# Altium PCB NeuroMIX_D.PcbDoc
Units mil, origin at the board's own origin, x right, y up, seen from the top; angles counter-clockwise.
Board outline 2000 x 1005 mil, 2 copper layers (Top Layer, Bottom Layer), stack 61.8 mil thick; 23 components, 13 nets, 80 pads, 233 vias.
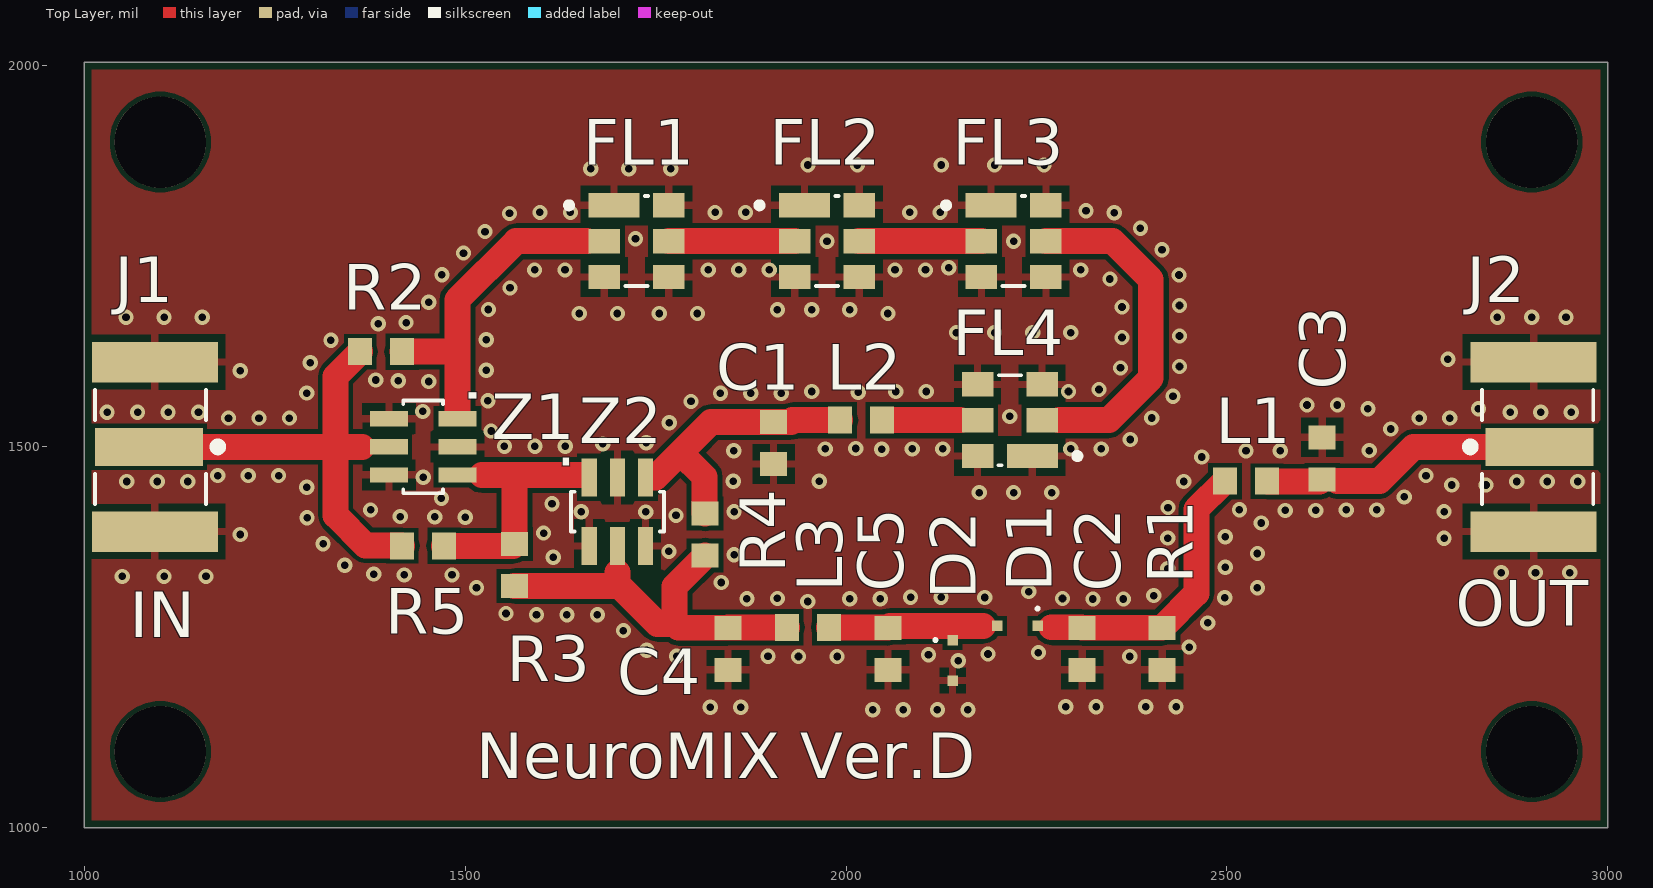
[diagram p0: Top Layer view]
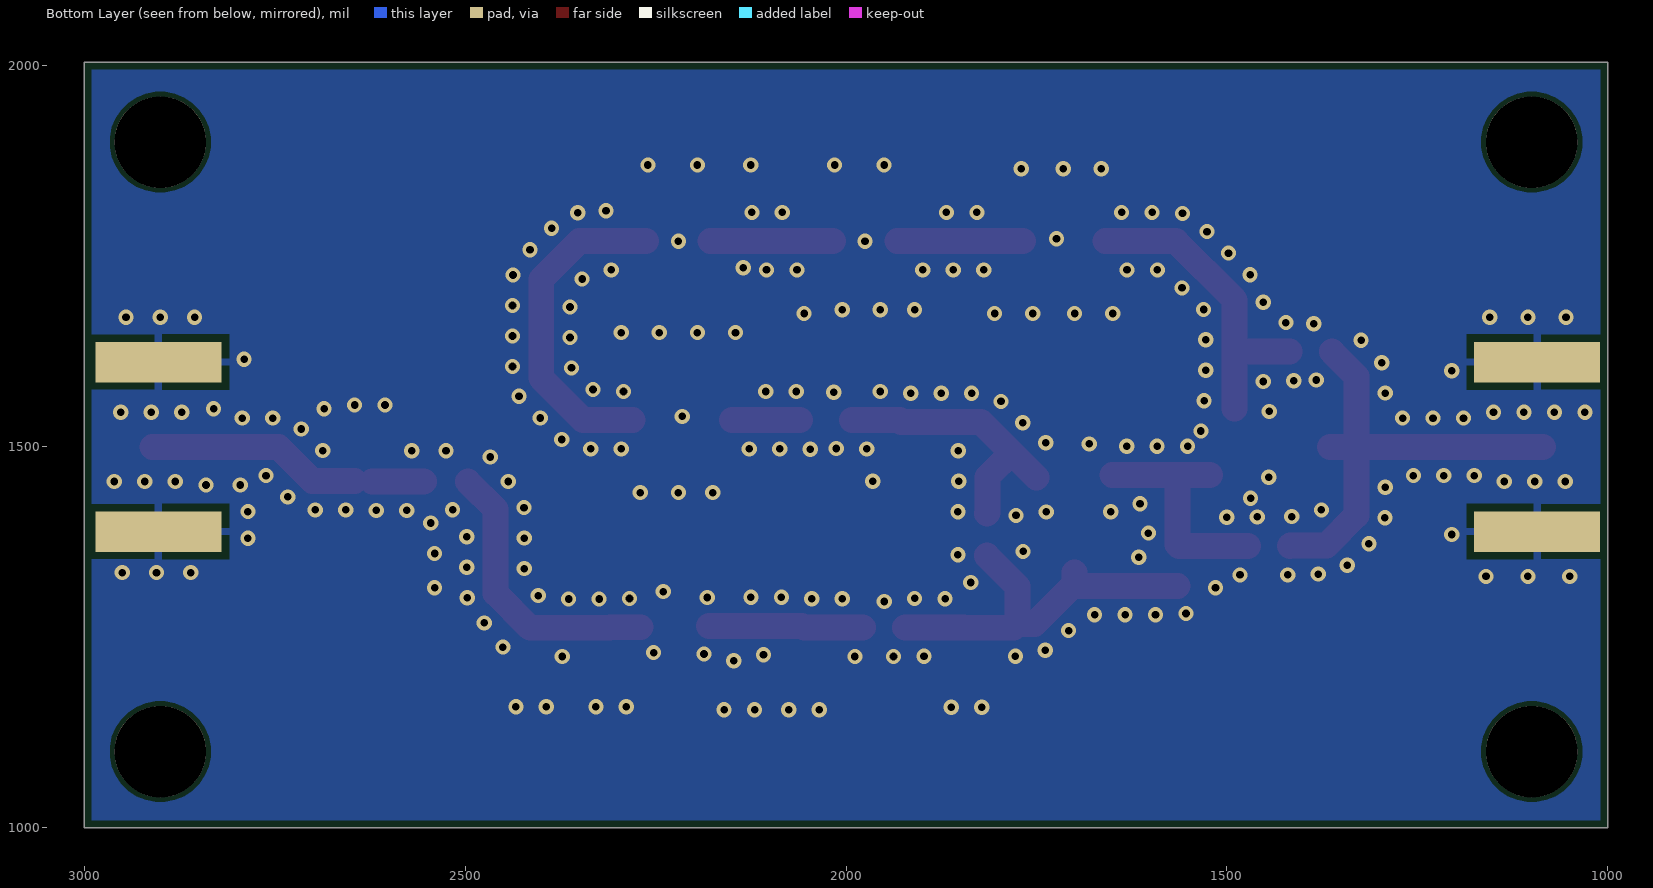
[diagram p1: Bottom Layer view, seen from below]

## Layer stack, top to bottom
Top Solder: solder mask 0.4, Solder Resist, Dk 3.5
Top Layer: signal copper 1.4
Dielectric 1: core 59, Core-043, Dk 4.3
Bottom Layer: signal copper 1.4
Bottom Solder: solder mask 0.4, Solder Resist, Dk 3.5

## Board outline
1000,1000 3000,1000 3000,2005 1000,2005

## Design rules (kind name [scope] priority, off if disabled: settings)
BoardOutlineClearance [All] p1: gap=10 ignorepadtopadclearanceinfootprint=FALSE except(0: Arc-SplitContinuation Track-SplitContinuation SMDPad-SplitContinuation THPad-SplitContinuation Via-SplitContinuation Fill-SplitContinuation Poly-SplitContinuation Region-SplitContinuation Text-SplitContinuation)
Clearance [All] p1: gap=6 ignorepadtopadclearanceinfootprint=FALSE except(0: Arc-Hole Track-Hole SMDPad-Hole THPad-Hole Via-Hole Fill-Hole Poly-Hole Region-Hole Text-Hole)
HoleSize [All] p1: absolutevalues=TRUE maxlimit=120 minlimit=1 maxpercent=80.000 minpercent=20.000
MinimumSolderMaskSliver [All] p1: minsoldermaskwidth=4
PolygonConnect [All] p1: thpad.connectstyle=Relief thpad.reliefconductorwidth=10 thpad.reliefentries=4 thpad.polygonreliefangle="90 Angle" thpad.airgapwidth=10 smdpad.connectstyle=Relief smdpad.reliefconductorwidth=10 smdpad.reliefentries=4 smdpad.polygonreliefangle="90 Angle" smdpad.airgapwidth=10 via.connectstyle=Direct via.reliefconductorwidth=10 via.reliefentries=4 via.polygonreliefangle="90 Angle" via.airgapwidth=10
RoutingVias [All] p1: holewidth=10 width=20 viastyle="Through Hole" minholewidth=6 minwidth=12 maxholewidth=28 maxwidth=50
SilkToSilkClearance [All] p1: silktosilkclearance=4
SilkToSolderMaskClearance [IsPad] p1: minsilkscreentomaskgap=4 clearancetoexposedcopper=TRUE
SolderMaskExpansion [All] p1: expansion=4 istentingtop=FALSE
Width [All] p1: maxlimit=50 minlimit=10 preferedwidth=34
26 further rules are at their usual default settings.

## Components (designator, comment, footprint, x,y, rotation, side; value= is the part's Value field where it differs from the comment)
C1 "6.8pF" SMD-0603 1905,1505 r90 top
C2 "1nF" SMD-0603 2310,1235 r90 top
C3 "82pF" SMD-0603 2625,1485 r270 top
C4 "44pF" SMD-0603 1845,1235 r90 top
C5 "1p_DNI" SMD-0603 2055,1235 r90 top
D1 "BAT63-02V" INF-SC79_V 2225,1265 r180 top
D2 "BAT63-02V" INF-SC79_V 2140,1220 r270 top
FL1 "SF2098E" FIL_SF2098E 1725,1770 r0 top
FL2 "SF2098E" FIL_SF2098E 1975,1770 r0 top
FL3 "SF2098E" FIL_SF2098E 2220,1770 r0 top
FL4 "SF2098E" FIL_SF2098E 2215,1535 r180 top
J1 "SMA-J-P-H-ST-EM1" SMA-J-P-H-ST-EM1 1085,1500 r270 top locked
J2 "SMA-J-P-H-ST-EM1" SMA-J-P-H-ST-EM1 2910,1500 r90 top
L1 "180nH" SMD-0603 2525,1455 r0 top
L2 "4.7nH" SMD-0603 2020,1535 r180 top
L3 "2.2nH" SMD-0603 1950,1263 r0 top
R1 "510k" SMD-0603 2415,1235 r90 top
R2 "0" SMD-0603 1390,1625 r0 top
R3 "0" SMD-0603 1565,1345 r270 top
R4 "0" SMD-0603 1815,1385 r90 top
R5 "0" SMD-0603 1445,1370 r0 top
Z1 "SP-2C1+" SP-2C1+ 1445,1500 r270 top
Z2 "SP-2C1+" SP-2C1+ 1700,1415 r0 top

## Footprints (in the part's own frame and the unit in brackets; to place one, negate y for a bottom-side part, rotate by r counter-clockwise, add the part's x,y. Pads: shape width x height; smd on the part's side, far side on the other; paste and mask are expansions set on the pad)
FIL_SF2098E [mm] "SAW Filter SM3030-6"
  rect 1.7x0.81 smd mask+0.051: 1(-0.75,1.195)
  rect 1.05x0.81 smd mask+0.051: 2(-1.075,0) 3(-1.075,-1.195) 4(1.075,-1.195) 5(1.075,0) 6(1.075,1.195)
  silkscreen extent -2.35,-1.5 0.38,1.5
INF-SC79_V [mm] "SC79, 2-Leads, Body 1.2x0.8 mm"
  rect 0.35x0.35 smd: 1(-0.672,0) 2(0.678,0)
  silkscreen extent -0.72,-0.62 -0.62,-0.53, body extent -0.6,-0.4 0.6,0.4, height 0.59
SMA-J-P-H-ST-EM1 [mm] "SMA-J-P-H-ST-EM1"
  rect 1.27x3.6 smd: 1(0,0)
  rect 1.35x4.2 smd: 2_1(-2.825,0.2) 3_1(2.825,0.2)
  rect 1.35x4.2 smd far side: 2_2(-2.825,0.2) 3_2(2.825,0.2)
  silkscreen extent -1.9,-1.8 1.9,2.44
SMD-0603 [mm] "SMD Body 1.6x0.8mm, IPC High Density"
  rect 0.8x0.9 smd: 1(-0.7,0) 2(0.7,0)
  body extent -0.87,-0.48 0.87,0.48, height 1.3
SP-2C1+ [mil] "Power Splitter/Combiner 640 to 1100MHz"
  rect 20x50 smd mask+2: 1(-37,45) 2(0,45) 3(37,45) 4(37,-45) 5(0,-45) 6(-37,-45)
  silkscreen extent -61,-26 61,26

## Part data
C1 C2 C3 C4 C5: library part CAP0603, "Ceramic Capacitor 0603"
D1 D2: "Single Silicon Schottky Diode, 100 mA IF Max, SC79, Green", Manufacturer=Infineon, ComponentLink1Description="Manufacturer URL", ComponentLink1URL=http://www.infineon.com/, ComponentLink2Description=Datasheet, ComponentLink2URL=http://www.infineon.com/dgdl/bat63series.pdf?folderId=db3a304314dca389011518104e5d0df2&fileId=db3a304314dca38901151817843c0df4&location=en.Products.RF.RF_Mixer___Detector_Schottky_Diodes.DATASHEET.bat63series.pdf, ComponentLink3Description="Package Specification", ComponentLink3URL=http://www.infineon.com/dgdl/SC79-Package_Overview.pdf?folderId=db3a30431936bc4b011951fbddb03b15&fileId=db3a30431936bc4b01195226fe583b41, Configuration=Single, CT (typ)="0.65 pF", DatasheetVersion=Jun-2011, Green=yes, Group="RF Signal Detection + Power Leveling", Halogen-free=yes, IF (max)="100 mA", Mounting Technology="Surface Mount", PackageDescription="2-Pin Semiconductor Package, 0.8 x 1.2 mm Body", PackageReference=SC79, PartNumber=BAT63-02V, VF (typ)="0.19 V", VR (max)="3 V"
FL1 FL2 FL3 FL4: "915MHz Frequency Wireless RF SAW Filter (Sound Acoustic Wave) 1.9dB 26MHz Bandwidth 6-SMD, No Lead", Package="SMD-6 Murata", Arrow_Electronics-Purchase-URL=https://snapeda.com/shop?store=Arrow+Electronics&id=2722455, Availability=Good, DigiKey-Purchase-URL=https://snapeda.com/shop?store=DigiKey&id=2722455, MF="Murata Electronics", Mouser-Purchase-URL=https://snapeda.com/shop?store=Mouser&id=2722455, MP=SF2098E, Price=None, SnapEDA_Link=https://www.snapeda.com/parts/SF2098E/Murata%20Electronics%20North%20America/view-part/2722455/?ref=snap
J1 J2: "Connector SMA F 50Ohm Solder ST Edge Mount Gold Over Nickel Tray", Package=None, Availability=Unavailable, MF=Samtec, MP=SMA-J-P-H-ST-EM1, Price=None, SnapEDA_Link=https://www.snapeda.com/parts/SMA-J-P-H-ST-EM1/Samtec%20Inc./view-part/?ref=snap
L1 L2 L3: library part L0603, "Inductor 0603"
R1 R2 R3 R4 R5: library part RES0603, "Resistor-0603"
Z1 Z2: "Power Divider, 2 Way-0 , 640 to 1100MHz, 50 ohms, SMT", Package=None, Availability=Warning, Check_prices=https://www.snapeda.com/parts/SBTC-2-10L+/Mini-Circuits/view-part/564803/?ref=eda, MF=Mini-Circuits, MP=SBTC-2-10L+, Price=None, Purchase-URL=https://pricing.snapeda.com/search/part/SBTC-2-10L+/?ref=eda, SnapEDA_Link=https://www.snapeda.com/parts/SBTC-2-10L+/Mini-Circuits/view-part/564803/?ref=snap

## Free pads (board coordinates)
  round 120 hole 120 unplated: 1(1100,1100) 1(1100,1900) 1(2900,1100) 1(2900,1900)

## Via types
v1: diameter 20, hole 10, Top Layer to Bottom Layer, tented both sides, 233 vias

## Nets (pads, with @x,y where several pads share a name; then routed paths per layer and width w, separated by ;. In a path a pad name is that pad's centre, name@x,y a point inside that pad or via, vN(x,y) a via of type N, cw(c..) or ccw(c..) an arc to the next point about the centre after c; other vN are vias at no path point)
GND: C1.1 C2.1 C3.1 C4.1 C5.1 D2.2 FL1.1 FL1.3 FL1.4 FL1.6 FL2.1 FL2.3 FL2.4 FL2.6 FL3.1 FL3.3 FL3.4 FL3.6 FL4.1 FL4.3 FL4.4 FL4.6 J1.2_1 J1.2_2 J1.3_1 J1.3_2 J2.2_1 J2.2_2 J2.3_1 J2.3_2 R1.1 Z1.2 Z1.4 Z1.6 Z2.2 Z2.4 Z2.6
  other v1: 2035,1155 2075,1155 2120,1155 2160,1155 1821.93,1158.25 1861.93,1158.25 2288.28,1158.87 2328.28,1158.87 2393.28,1158.87 2433.28,1158.87 2147.45,1219.28 1777.61,1225.23 1897.61,1225.05 1937.61,1224.89 1988.29,1224.89 2372.29,1224.83 2108.26,1227.28 2186.45,1228.16 2252.55,1229.99 1738.37,1232.98 2450.34,1237.19 1707.83,1258.81 2474.7,1268.91 1593.73,1279.72 1633.73,1279.72 1673.73,1279.72 1553.76,1281.3 1949.75,1297.05 2324.1,1300.28 2364.1,1300.28 1869.96,1300.5 1909.95,1301.11 2004.85,1300.5 2044.85,1300.5 2284.1,1301 2181.97,1302.33 2497.04,1302.09 2084.79,1302.72 2124.79,1302.72 2403.85,1304.76 2240,1310 1515,1315 2540,1315 1836.22,1322 1050,1330 1105,1330 1160,1330 1420.19,1331.89 1482.93,1331.89 1380.21,1332.99 2860,1335 2905,1335 2950,1335 2422.28,1340.26 2497.72,1342.09 1341.96,1344.69 1615.84,1355.17 1853.11,1358.26 2540,1360 1767.55,1362.81 1313.67,1372.98 2422.28,1380.26 2785,1380 2497.72,1382.09 1205,1385 1603.11,1386.8 2545,1400 1292.67,1407.02 1415.09,1408.44 1460.31,1408.11 1500.3,1407.72 1776.89,1410.01 1652.62,1414.68 1737.16,1414.61 1853.11,1414.86 2785,1415 1376.08,1417.27 2576.47,1416.56 2616.47,1416.56 2656.46,1417.28 2696.46,1417.28 2516.3,1417.51 2422.67,1420.26 1614.05,1425.28 1468.99,1432.61 2732.66,1434.3 2175,1440 2220,1440 2270,1440 1292.28,1447.02 2795,1450 2840,1450 1056.04,1454.61 1096.04,1454.61 1136.04,1454.61 1852.01,1454.84 1965,1455 2443.16,1454.61 2880.51,1454.61 2920.51,1454.61 2960.51,1454.61 1445,1460 1175.3,1462.28 1215.3,1462.28 1255.3,1462.28 2761.25,1462.28 2467,1486.73 1852.81,1494.83 2525,1495 2570,1495 2686.74,1495.09 1972.77,1497.28 2047.07,1496.89 2087.07,1497.28 2127.07,1497.28 2294.87,1497.28 2334.87,1497.28 2012.76,1497.8 1551.64,1500.72 1591.64,1500.72 1631.64,1500.72 1680.8,1503.84 1737.86,1505.39 2372.93,1509.58 1534.15,1520.74 2715.03,1523.38 1768.16,1531.51 1189.49,1537.72 1229.49,1537.72 1269.49,1537.72 2401.21,1537.86 2752.37,1537.72 2792.37,1537.72 2215,1540 1030.23,1545.39 1070.23,1545.39 1110.23,1545.39 1150.23,1545.39 2871.85,1545.39 2911.85,1545.39 2951.85,1545.39 1444.61,1546.55 2685,1550 2830,1550 2605,1555 2645,1555 1796.56,1559.68 1530.02,1560.53 2429.22,1566.42 1835.12,1570.28 1875.12,1570.28 1915.12,1570.28 1292.28,1570.6 2015.99,1571.56 1955.05,1572.72 2065.24,1572.72 2105.24,1572.72 2292.09,1572.72 2332,1575.35 1452.28,1585.81 1412.29,1586.89 1382.76,1587.8 1205,1600 1527.72,1600.46 2360.28,1603.63 2437.72,1605.51 1296.95,1610.33 2790,1615 1323.94,1639.85 1527.72,1640.46 2362.28,1643.58 2437.72,1645.51 2145,1650 2195,1650 2245,1650 2295,1650 1385.99,1661.56 1422.61,1663.11 1055,1670 1105,1670 1155,1670 2855,1670 2900,1670 2945,1670 1650,1675 1700,1675 1755,1675 1805,1675 2055,1675 1530.7,1680.35 1910,1680 1955,1680 2005,1680 2362.28,1683.58 2437.72,1685.51 1452.28,1689.94 1558.99,1708.63 2346.36,1720.28 1469.63,1725.98 2437.03,1725.5 1591.25,1732.28 1631.25,1732.28 1819.28,1732.28 1859.28,1732.28 1899.28,1732.28 2064.28,1732.28 2104.28,1732.28 2308.2,1732.28 2135,1735 1497.92,1754.27 2414.68,1758.67 1975,1770 2220,1770 1723.74,1773.23 1526.2,1782.55 2386.39,1786.96 1558.32,1806.4 2351.97,1807.33 1598.29,1807.72 1638.29,1807.72 1828.19,1807.72 1868.19,1807.72 2083.53,1807.72 2123.53,1807.72 2315,1810 1665,1865 1715,1865 1770,1865 1950,1870 2015,1870 2125,1870 2195,1870 2260,1870
NetC2_2: C2.2 D1.1 L1.1 R1.2 | length 369.9
  Top Layer w34: 2269.74,1263.28 C2.2@2309.28,1263.28 ; C2.2 R1.2 2460,1307.56 2460,1418.09 L1.1@2496.19,1454.28
NetC3_2: C3.2 J2.1 L1.2 | length 351.7
  Top Layer w34: L1.2@2553.81,1454.28 C3.2@2621.84,1454.28 ; 2644.98,1455 2700,1455 2745,1500 J2.1
NetC5_2: C5.2 D1.2 D2.1 L3.2 | length 203.9
  Top Layer w34: L3.2 1977.78,1262.78 2054.78,1262.78 C5.2 2055,1263.09 2055.72,1263.81 2056.25,1263.81 2057.44,1265 2180,1265
NetFL1_5: FL1.5 FL2.2 | length 165.4
  Top Layer w34: FL1.5 FL2.2
NetFL2_5: FL2.5 FL3.2 | length 160.4
  Top Layer w34: FL2.5 FL3.2
NetFL3_5: FL3.5 FL4.2 | length 431.2
  Top Layer w34: FL3.5 2350,1770 2400,1720 2400,1590 2345,1535 2280,1535
NetFL4_5: FL4.5 L2.1 | length 90
  Top Layer w34: L2.1@2060,1535 2150,1535
NetJ1_1: J1.1 R2.1 R5.1 Z1.5 | length 612.8
  Top Layer w34: J1.1 1330,1500 ; R2.1 1361.91,1625 1361.19,1624.28 1361.19,1623.75 1330,1592.56 1330,1500 ; 1365,1500 1330,1500 ; R5.1 1416.72,1370.72 1369.28,1370.72 1330,1410 1330,1500
NetR3_1: R3.1 R5.2 Z1.3 Z2.1 | length 312.3
  Top Layer w34: R5.2 1562.98,1370 1565,1372.02 R3.1 1565,1463 ; 1522,1463 1565,1463 ; 1650,1463 1565,1463
RF: C4.2 L3.1 R3.2 R4.1 Z2.5 | length 504.4
  Top Layer w34: R3.2 1702.56,1317.44 1752.44,1267.56 1775,1267.56 ; 1700,1317.44 1700,1335 ; R4.1 1815,1356.91 1775,1316.91 1775,1267.56 ; L3.1 1922.22,1262.78 1845.22,1262.78 C4.2 1780,1262.56 1775,1267.56
SAW_IN: FL1.2 R2.2 Z1.1 | length 416.7
  Top Layer w34: R2.2 1490,1625 ; 1490,1550 1490,1625 ; 1659.33,1770 1567,1770 1490,1693 1490,1625
SAW_OUT: C1.2 L2.2 R4.2 Z2.3 | length 366.9
  Top Layer w34: 1750,1460 1782.5,1492.5 ; R4.2 1814.28,1413.28 1814.28,1460.72 1782.5,1492.5 ; L2.2 1930,1535 1927.56,1532.56 1822.56,1532.56 1782.5,1492.5

## Polygon pours and split planes (outlines as drawn)
GND on Top Layer "GND_L01_P002" (solid, pour order 2): 1000,1000 3000,1000 3000,2005 1000,2005
GND on Bottom Layer "GND_L02_P003" (solid, pour order 3): 1000,1000 3000,1000 3000,2005 1000,2005

## Silkscreen, mask and mechanical layers (free items; w line width, h text height)
Top Overlay:
  text "OUT" at 2800,1265 h60
  text "IN" at 1060,1250 h60
  text "NeuroMIX Ver.D" at 1515,1065 h60